# EAGLE board Universal sheald krsbi2022 (EAGLE 9.6.2)
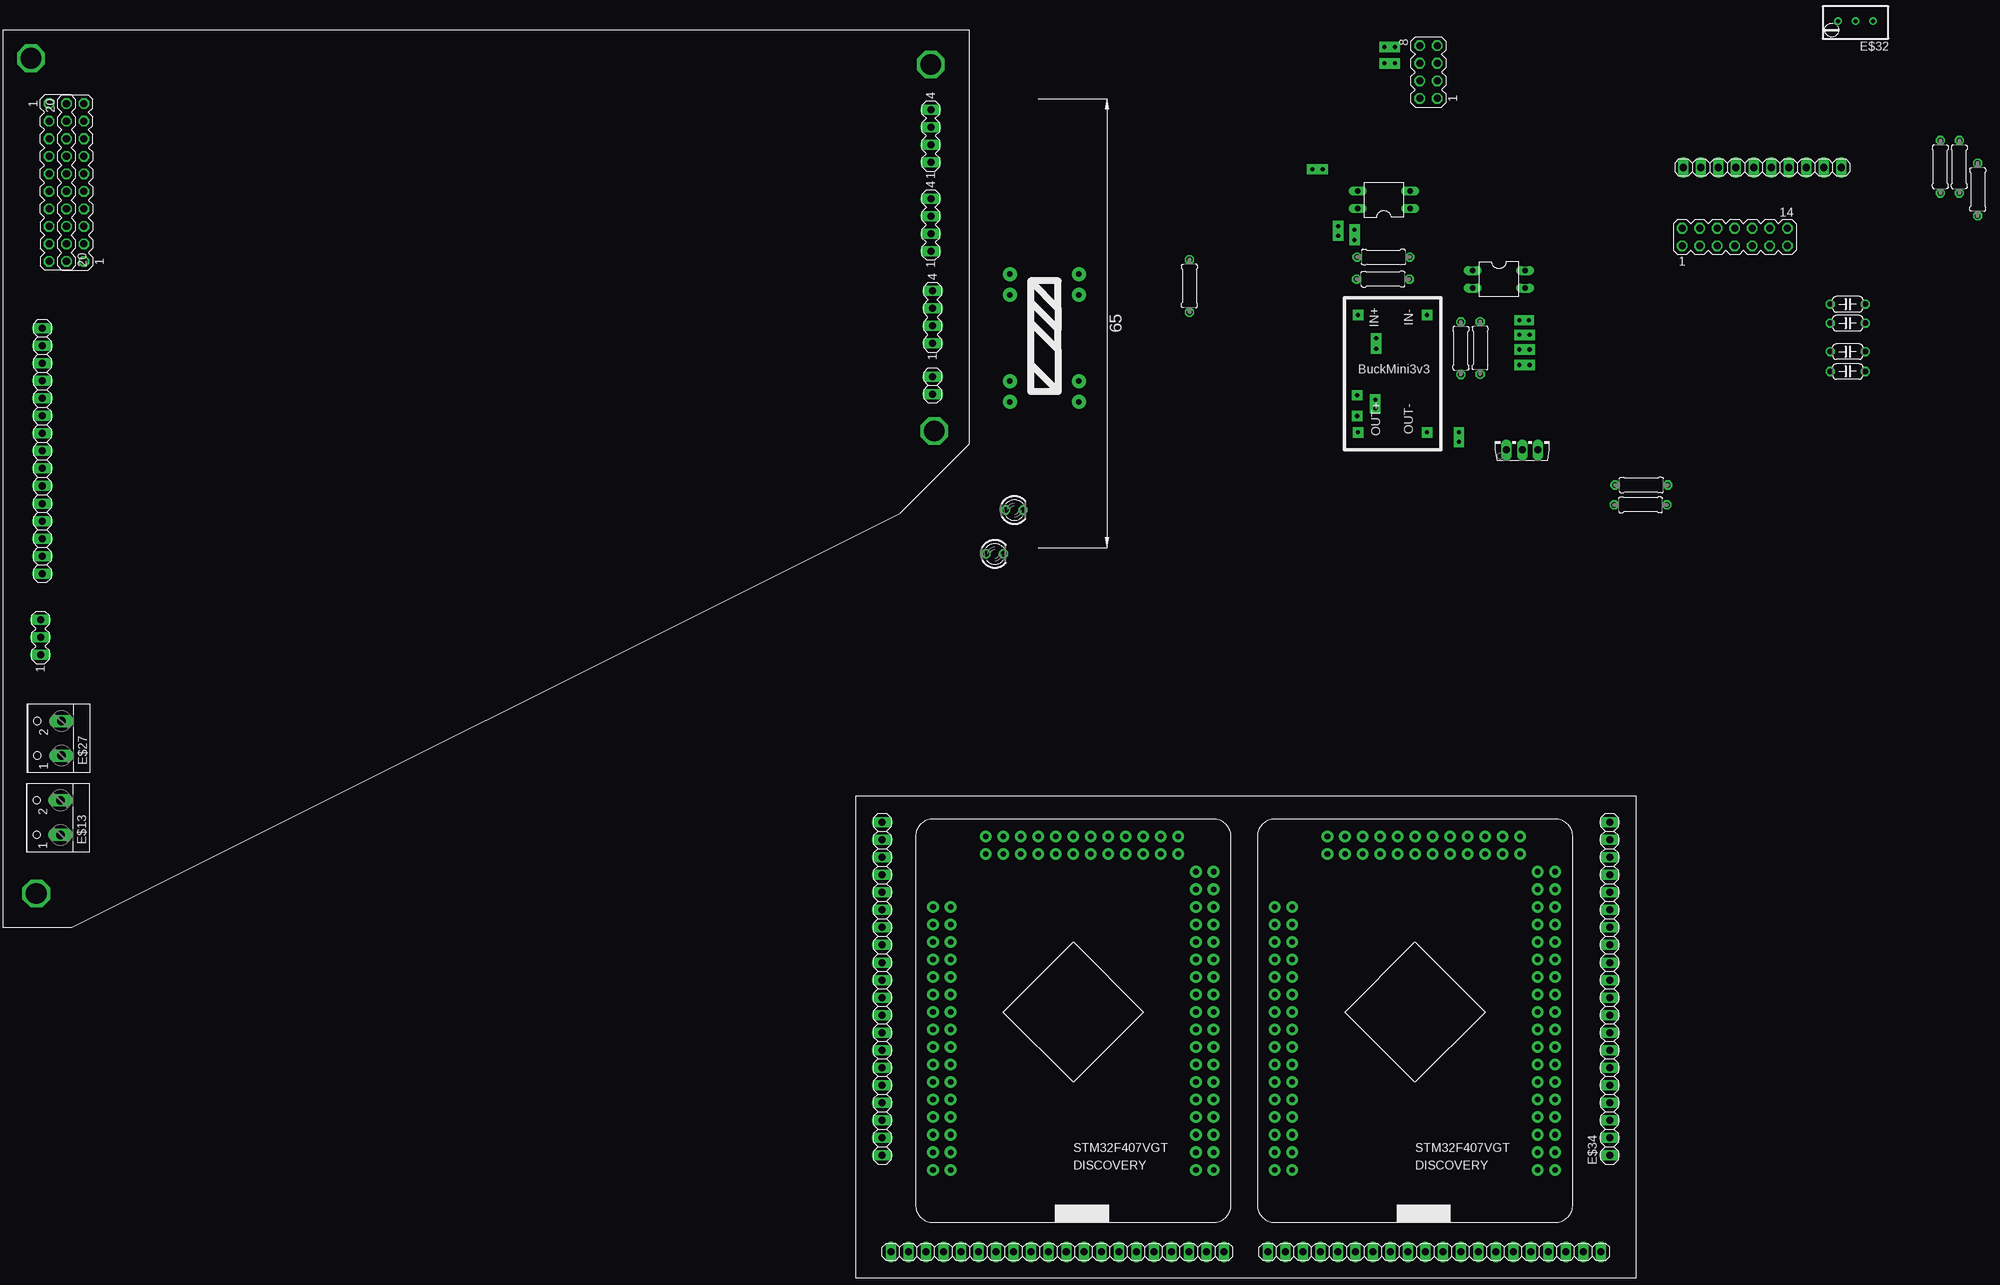
[diagram p0: board, top side]

No outline drawn. Coordinates in mm, seen from the top.
Copper layers (1*16): Top 0.035mm / dielectric 1.5mm / Bottom 0.035mm
Design rules "default": minimum track width 6mil, minimum drill 0.35mm, track to track 6mil, track to pad 6mil, pad to pad 6mil, via to via 6mil, smd to smd 6mil, copper to edge 40mil, drill to drill 6mil, minimum pad ring 10mil, minimum via ring 8mil, stop-mask expansion 4mil, vias tented up to drill 0mil, thermal gap 10mil

## Footprints (pad centres in the part's own frame; a part is rotated, then mirrored left to right if it is on the bottom)
STM32F407VGT = drill 0.8 pad 1.676: 1 22.86,12.7; 2 25.4,12.7; 3 22.86,15.24; 3.3V(0) -12.7,-25.4; 3.3V(1) 22.86,-20.32; 3.3V(3) 10.16,17.78; 4 25.4,15.24; GND -15.24,-27.94; GND(0) -15.24,-25.4; GND(1) 25.4,-20.32; GND(2) -15.24,10.16; GND(3) 12.7,17.78; PA0 25.4,-15.24; PA1 22.86,-12.7; PA2 25.4,-12.7; PA3 25.4,-10.16; PA4 22.86,-7.62; PA5 25.4,-7.62; PA6 22.86,-5.08; PA7 25.4,-5.08; PA8 -15.24,7.62; PA9 -12.7,5.08; PA10 -15.24,5.08; PA11 -12.7,2.54; PA12 -15.24,2.54; PA13 -12.7,0; PA14 -15.24,0; PA15 -12.7,-2.54; PB0 22.86,0; PB1 25.4,0; PB2 25.4,10.16; PB3 -12.7,-17.78; PB4 -15.24,-17.78; PB5 -12.7,-20.32; PB6 -15.24,-20.32; PB7 -12.7,-22.86; PB8 22.86,2.54; PB9 25.4,2.54; PB10 15.24,17.78; PB11 12.7,20.32; PB12 10.16,20.32; PB13 7.62,17.78; PB14 7.62,20.32; PB15 5.08,17.78; PC0 22.86,-17.78; PC1 25.4,-17.78; PC2 22.86,-15.24; PC3 22.86,-10.16; PC4 22.86,-2.54; PC5 25.4,-2.54; PC6 -5.08,20.32; PC7 -7.62,17.78; PC8 -7.62,20.32; PC9 -12.7,7.62; PC10 -15.24,-2.54; PC11 -12.7,-5.08; PC12 -15.24,-5.08; PC13 25.4,-22.86; PD0 -12.7,-7.62; PD1 -15.24,-7.62; PD2 -12.7,-10.16; PD3 -15.24,-10.16; PD4 -12.7,-12.7; PD5 -15.24,-12.7; PD6 -12.7,-15.24; PD7 -15.24,-15.24; PD8 5.08,20.32; PD9 2.54,17.78; PD10 2.54,20.32; PD11 0,17.78; PD12 0,20.32; PD13 -2.54,17.78; PD14 -2.54,20.32; PD15 -5.08,17.78; PE0 -15.24,-22.86; PE1 22.86,5.08; PE2 22.86,-27.94; PE3 25.4,-27.94; PE4 22.86,-25.4; PE5 25.4,-25.4; PE6 22.86,-22.86; PE7 25.4,5.08; PE8 22.86,7.62; PE9 25.4,7.62; PE10 22.86,10.16; PE11 20.32,20.32; PE12 20.32,17.78; PE13 17.78,20.32; PE14 17.78,17.78; PE15 15.24,20.32; VCC -12.7,-27.94; VCC(2) -12.7,10.16
1X15 = drill 1.016 long: 1 -17.78,0; 2 -15.24,0; 3 -12.7,0; 4 -10.16,0; 5 -7.62,0; 6 -5.08,0; 7 -2.54,0; 8 0,0; 9 2.54,0; 10 5.08,0; 11 7.62,0; 12 10.16,0; 13 12.7,0; 14 15.24,0; 15 17.78,0
DIL04 = drill 0.813 long: 1 -1.27,-3.81; 2 1.27,-3.81; 3 1.27,3.81; 4 -1.27,3.81
0207/7 = drill 0.813 octagon: 1 -3.81,0; 2 3.81,0
MA07-2 = drill 1.016 octagon: 1 -7.62,-1.27; 2 -7.62,1.27; 3 -5.08,-1.27; 4 -5.08,1.27; 5 -2.54,-1.27; 6 -2.54,1.27; 7 0,-1.27; 8 0,1.27; 9 2.54,-1.27; 10 2.54,1.27; 11 5.08,-1.27; 12 5.08,1.27; 13 7.62,-1.27; 14 7.62,1.27
1X10 = drill 1.016 long: 1 -11.43,0; 2 -8.89,0; 3 -6.35,0; 4 -3.81,0; 5 -1.27,0; 6 1.27,0; 7 3.81,0; 8 6.35,0; 9 8.89,0; 10 11.43,0
MA10-2 = drill 1.016 octagon: 1 -11.43,-1.27; 2 -11.43,1.27; 3 -8.89,-1.27; 4 -8.89,1.27; 5 -6.35,-1.27; 6 -6.35,1.27; 7 -3.81,-1.27; 8 -3.81,1.27; 9 -1.27,-1.27; 10 -1.27,1.27; 11 1.27,-1.27; 12 1.27,1.27; 13 3.81,-1.27; 14 3.81,1.27; 15 6.35,-1.27; 16 6.35,1.27; 17 8.89,-1.27; 18 8.89,1.27; 19 11.43,-1.27; 20 11.43,1.27
MA04-1 = drill 1.016 long: 1 -3.81,0; 2 -1.27,0; 3 1.27,0; 4 3.81,0
MA03-1 = drill 1.016 long: 1 -2.54,0; 2 0,0; 3 2.54,0
W237-102 = drill 1.194 long: 1 -2.5,-1.27; 2 2.5,-1.27
TO126AV = drill 1.016 long: B 2.286,-1.27; C 0,-1.27; E -2.286,-1.27
C050-024X044 = drill 0.813 octagon: 1 -2.54,0; 2 2.54,0
LED3MM = drill 0.813 octagon: A -1.27,0; K 1.27,0
BUCK3V3 = drill 0.6 pad 1.5 square: IN+ -5,10; IN- 5,10; OUT+ -5,-7; OUT- 5,-7
MA04-2 = drill 1.016 octagon: 1 -3.81,-1.27; 2 -3.81,1.27; 3 -1.27,-1.27; 4 -1.27,1.27; 5 1.27,-1.27; 6 1.27,1.27; 7 3.81,-1.27; 8 3.81,1.27
1X02 = drill 1.016 long: 1 -1.27,0; 2 1.27,0
RTRIMT93YA = drill 0.61: 1 0,-2.54; 2 0,0; 3 0,2.54
1X20 = drill 1.016 long: 1 -24.13,0; 2 -21.59,0; 3 -19.05,0; 4 -16.51,0; 5 -13.97,0; 6 -11.43,0; 7 -8.89,0; 8 -6.35,0; 9 -3.81,0; 10 -1.27,0; 11 1.27,0; 12 3.81,0; 13 6.35,0; 14 8.89,0; 15 11.43,0; 16 13.97,0; 17 16.51,0; 18 19.05,0; 19 21.59,0; 20 24.13,0

## Placement (x,y rotation side)
E$1  [STM32F407VGT]  171.19,-35.11 0 top
E$2  [STM32F407VGT]  220.72,-35.11 0 top
E$3  [1X15]  26.89,41.09 90 top
E$4  [DIL04]  237.96,65.95 270 top
E$5  [0207/7]  221.16,65.98 0 top
E$6  [MA07-2]  272.12,72.08 0 top
E$7  [1X10]  276.12,82.15 0 top
E$8  [MA10-2]  29.14,79.97 270 top
E$9  [MA10-2]  31.64,79.97 90 top
E$10  [MA04-1]  155.9,60.47 90 top
E$11  [MA04-1]  155.65,73.84 90 top
E$12  [MA03-1]  26.64,14.09 90 top
E$13  [W237-102]  28.27,-12.04 90 top
E$14  [TO126AV]  241.34,42.51 0 top
E$15  [0207/7]  307.33,78.96 90 top
E$16  [0207/7]  193.12,64.99 90 top
E$17  [0207/7]  304.67,82.25 270 top
E$18  [0207/7]  301.92,82.25 270 top
E$19  [C050-024X044]  288.5,62.35 0 top
E$20  [C050-024X044]  288.5,59.6 0 top
E$21  [C050-024X044]  288.5,55.48 0 top
E$22  [C050-024X044]  288.5,52.6 0 top
E$23  [LED3MM]  167.75,32.54 0 top
E$24  [LED3MM]  164.91,26.19 0 top
E$25  [0207/7]  258.61,36.15 0 top
E$26  [0207/7]  258.48,33.27 0 top
E$27  [W237-102]  28.39,-0.54 90 top
E$28  [MA04-1]  155.65,86.72 90 top
E$29  [BUCK3V3]  222.53,50.78 0 top
E$30  [MA04-2]  227.75,95.98 90 top
E$31  [1X02]  155.9,50.59 90 top
E$32  [RTRIMT93YA]  289.62,103.36 90 top
E$33  [1X20]  148.59,-36.83 90 top
E$34  [1X20]  254,-36.83 90 top
E$35  [1X20]  173.99,-74.93 180 top
E$36  [1X20]  228.6,-74.93 180 top
E$42  [DIL04]  221.28,77.45 90 top
E$43  [0207/7]  235.24,56.01 90 top
E$44  [0207/7]  221.22,69.17 180 top
E$45  [0207/7]  232.44,55.97 270 top

## Library data of the parts
E$1 E$2 E$29 = KRSBI COMPONENT
E$3 E$33-E$36 = adafruit
E$4 E$42 = ic-package
E$5 E$15-E$18 E$25 E$26 E$43-E$45 = resistor
E$6 E$8-E$12 E$28 E$30 = con-lstb
E$7 E$31 = Connector
E$13 E$27 = con-wago-500
E$14 = transistor-power
E$19-E$22 E$32 = rcl
E$23 E$24 = led

## Nets
S$15: E$3.8
S$80: E$32.2
S$81: E$29.OUT-

## Tracks (layer width: path | path; a pad name or v marks a point on that pad's centre or on a via)
S$7  (via drill 0.6 pad 1.5)
  other vias: 240.91,57.91
S$17  (via drill 0.6 pad 1.5)
  other vias: 240.91,60.03
S$41  (via drill 3 pad 4)
  other vias: 25.27,97.97
S$51  (via drill 3 pad 4)
  other vias: 26.02,-23.04
S$52  (via drill 3 pad 4)
  other vias: 156.15,43.97
S$53  (via drill 3 pad 4)
  other vias: 155.65,97.09
S$59  (via drill 0.6 pad 1.5)
  other vias: 242.28,60.03
S$63  (via drill 0.6 pad 1.5)
  other vias: 242.41,57.91
S$64  (via drill 0.6 pad 1.5)
  other vias: 240.91,55.78
S$65  (via drill 0.6 pad 1.5)
  other vias: 242.41,55.78
S$66  (via drill 0.6 pad 1.5)
  other vias: 240.91,53.53
S$67  (via drill 0.6 pad 1.5)
  other vias: 242.41,53.53
S$88  (via drill 0.6 pad 1.5)
  other vias: 220.03,48.53
S$91  (via drill 0.6 pad 1.5)
  other vias: 232.16,42.41
S$92  (via drill 0.6 pad 1.5)
  other vias: 232.16,43.78
S$105  (via drill 0.6 pad 1.5)
  other vias: 217.03,71.66
S$106  (via drill 0.6 pad 1.5)
  other vias: 217.03,73.16
S$107  (via drill 0.6 pad 1.5)
  other vias: 214.66,72.28
S$108  (via drill 0.6 pad 1.5)
  other vias: 214.66,73.66
S$110  (via drill 0.6 pad 1.5)
  other vias: 221.38,97.23
S$111  (via drill 0.6 pad 1.5)
  other vias: 222.88,97.23
S$112  (via drill 0.6 pad 1.5)
  other vias: 221.38,99.61
S$113  (via drill 0.6 pad 1.5)
  other vias: 222.88,99.61
S$123  (via drill 0.6 pad 1.5)
  other vias: 220.03,47.28
S$125  (via drill 0.6 pad 1.5)
  other vias: 220.16,55.91
S$126  (via drill 0.6 pad 1.5)
  other vias: 220.16,57.41
S$128  (via drill 0.8 pad 2)
  other vias: 167.09,51.21
S$129  (via drill 0.8 pad 2)
  other vias: 167.09,66.71
S$130  (via drill 0.6 pad 1.5)
  other vias: 217.41,46.16
S$131  (via drill 0.6 pad 1.5)
  other vias: 217.41,49.16
S$152  (via drill 0.8 pad 2)
  other vias: 177.09,51.21
S$159  (via drill 0.6 pad 1.5)
  other vias: 212.41,81.91
S$160  (via drill 0.8 pad 2)
  other vias: 177.09,63.71
S$161  (via drill 0.6 pad 1.5)
  other vias: 210.91,81.91
S$166  (via drill 0.8 pad 2)
  other vias: 167.09,63.71
S$172  (via drill 0.8 pad 2)
  other vias: 167.09,48.21
S$173  (via drill 0.8 pad 2)
  other vias: 177.09,48.21
S$176  (via drill 0.8 pad 2)
  other vias: 177.09,66.71